# Altium PCB CTR-Controller-Rev-A.PcbDoc (part 1 of 2)
Units mil, origin at the board's own origin, x right, y up, seen from the top; angles counter-clockwise.
Board outline 3956.69 x 4568.8 mil, 2 copper layers (Top Layer, Bottom Layer), stack 61.2 mil thick; 177 components, 110 nets, 500 pads, 208 vias.
Unrouted connection lines stored in the file: 115.
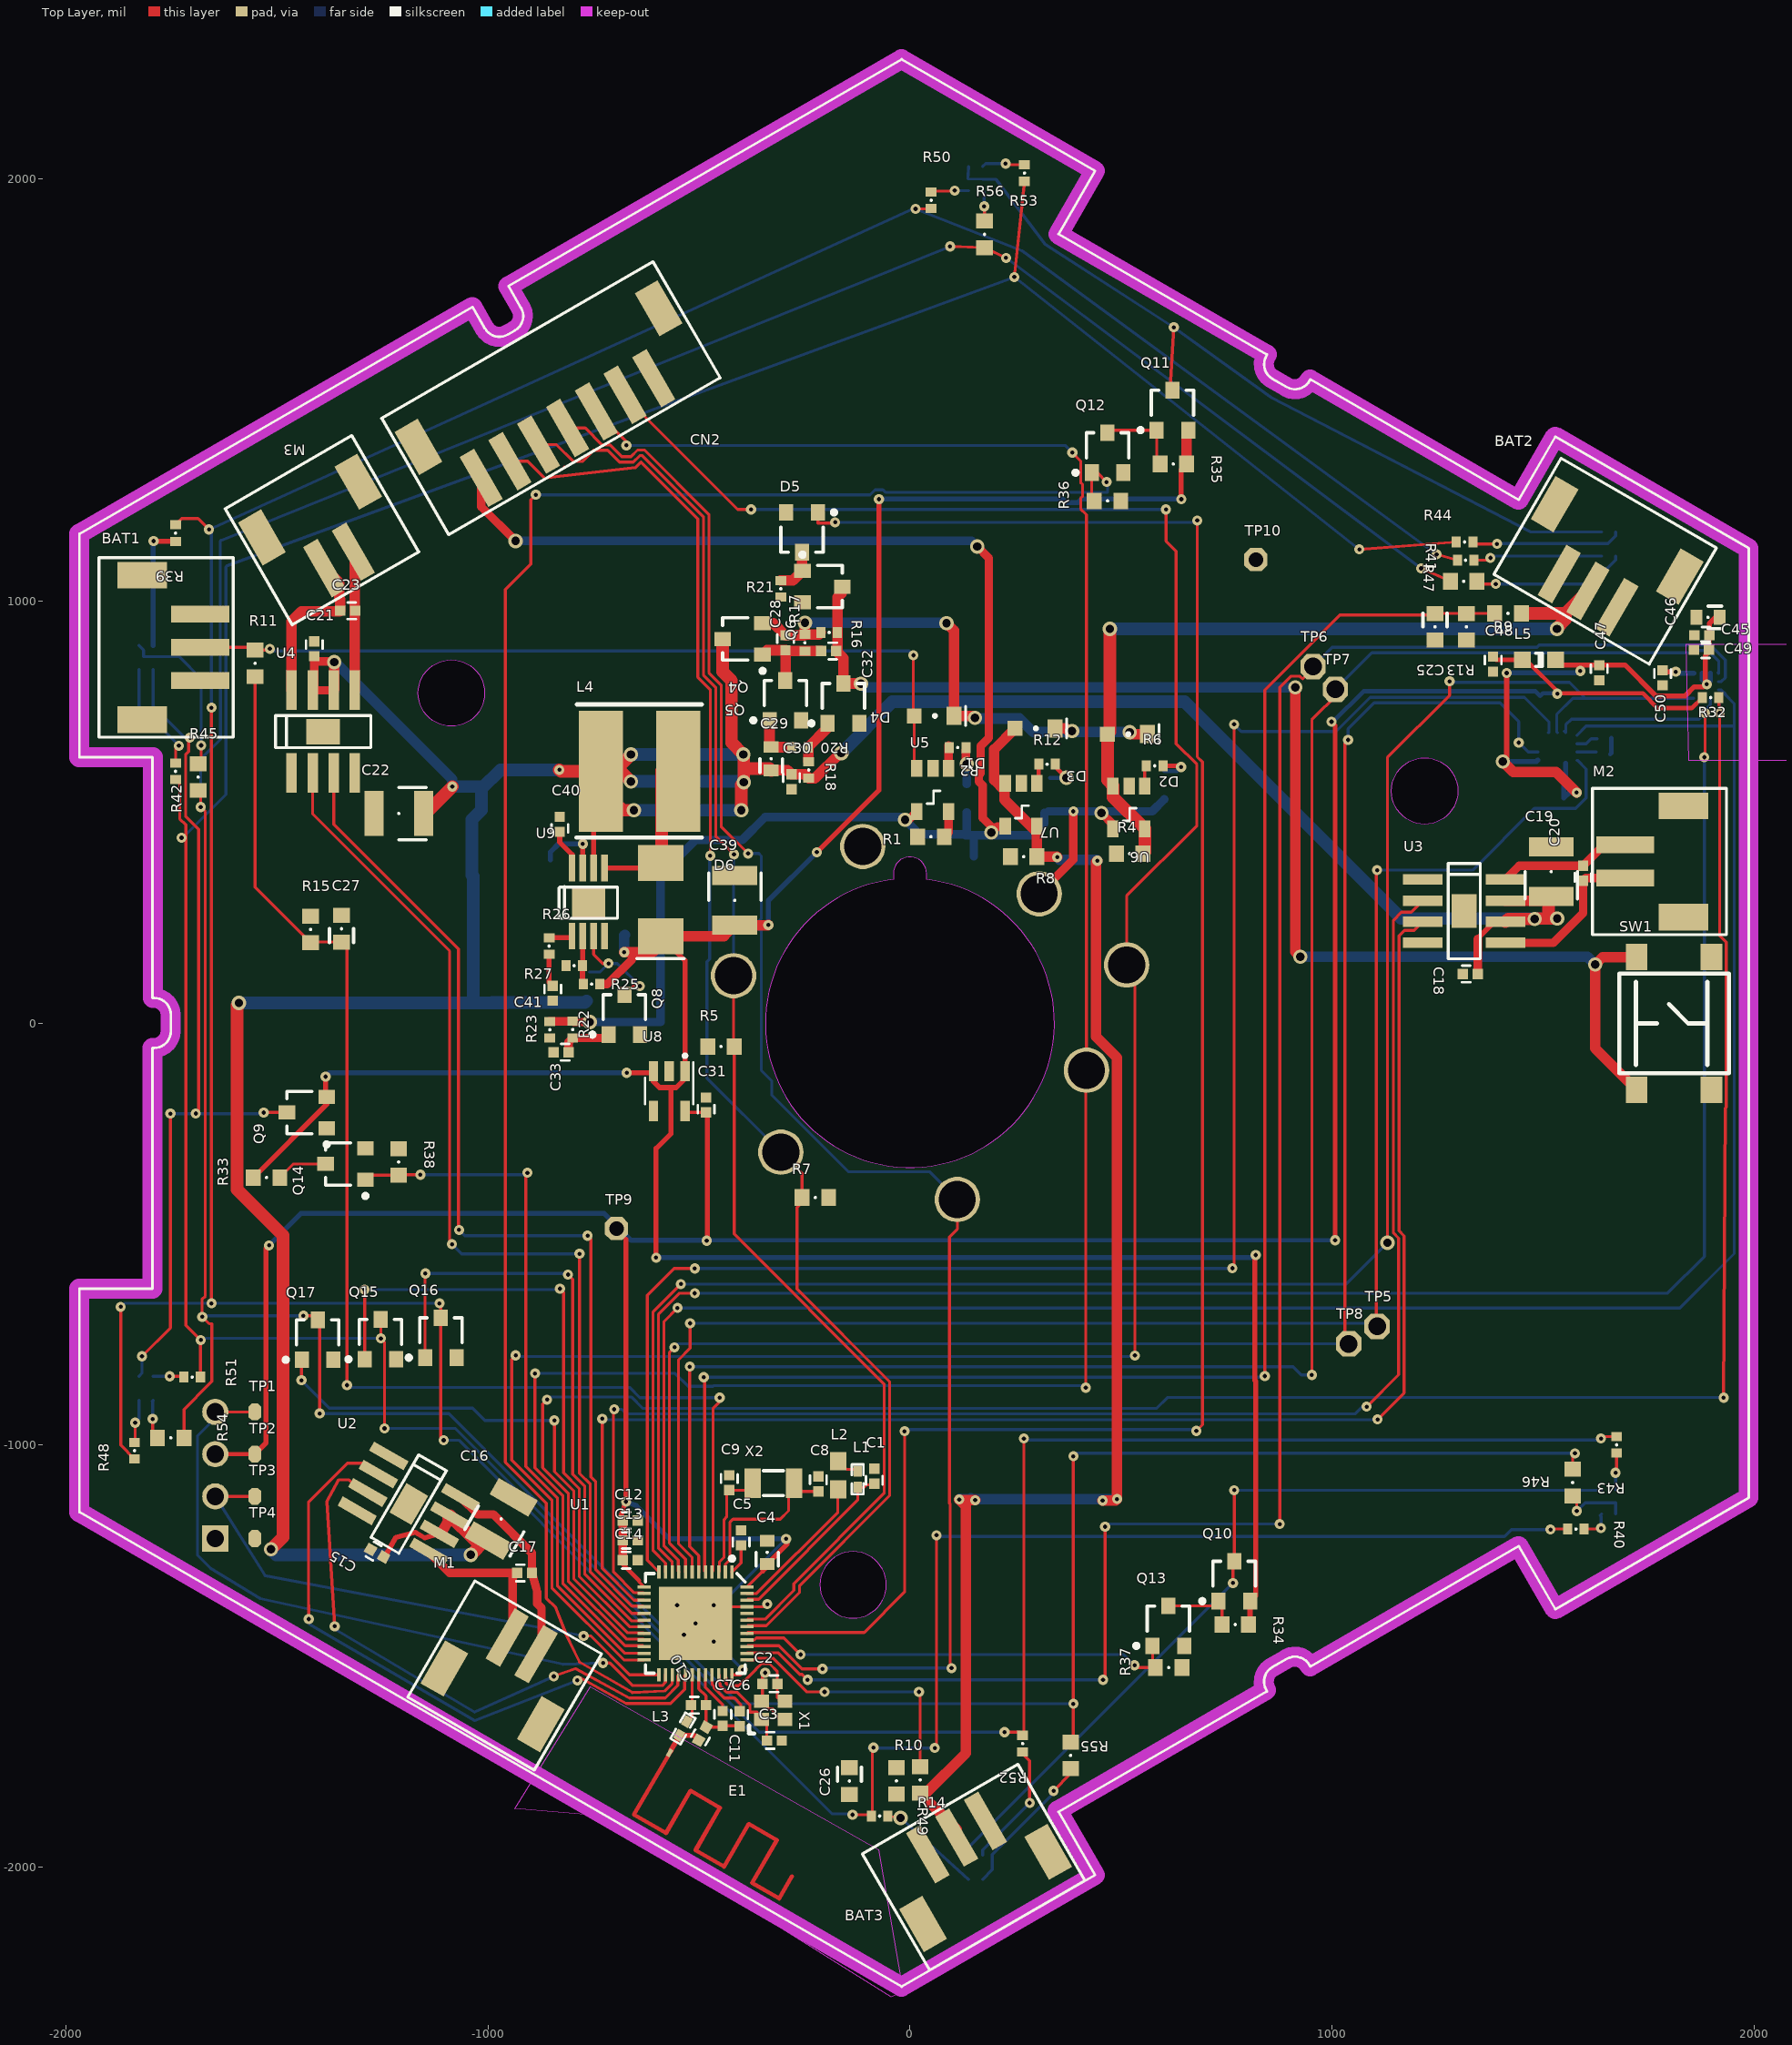
[diagram p0: Top Layer view]
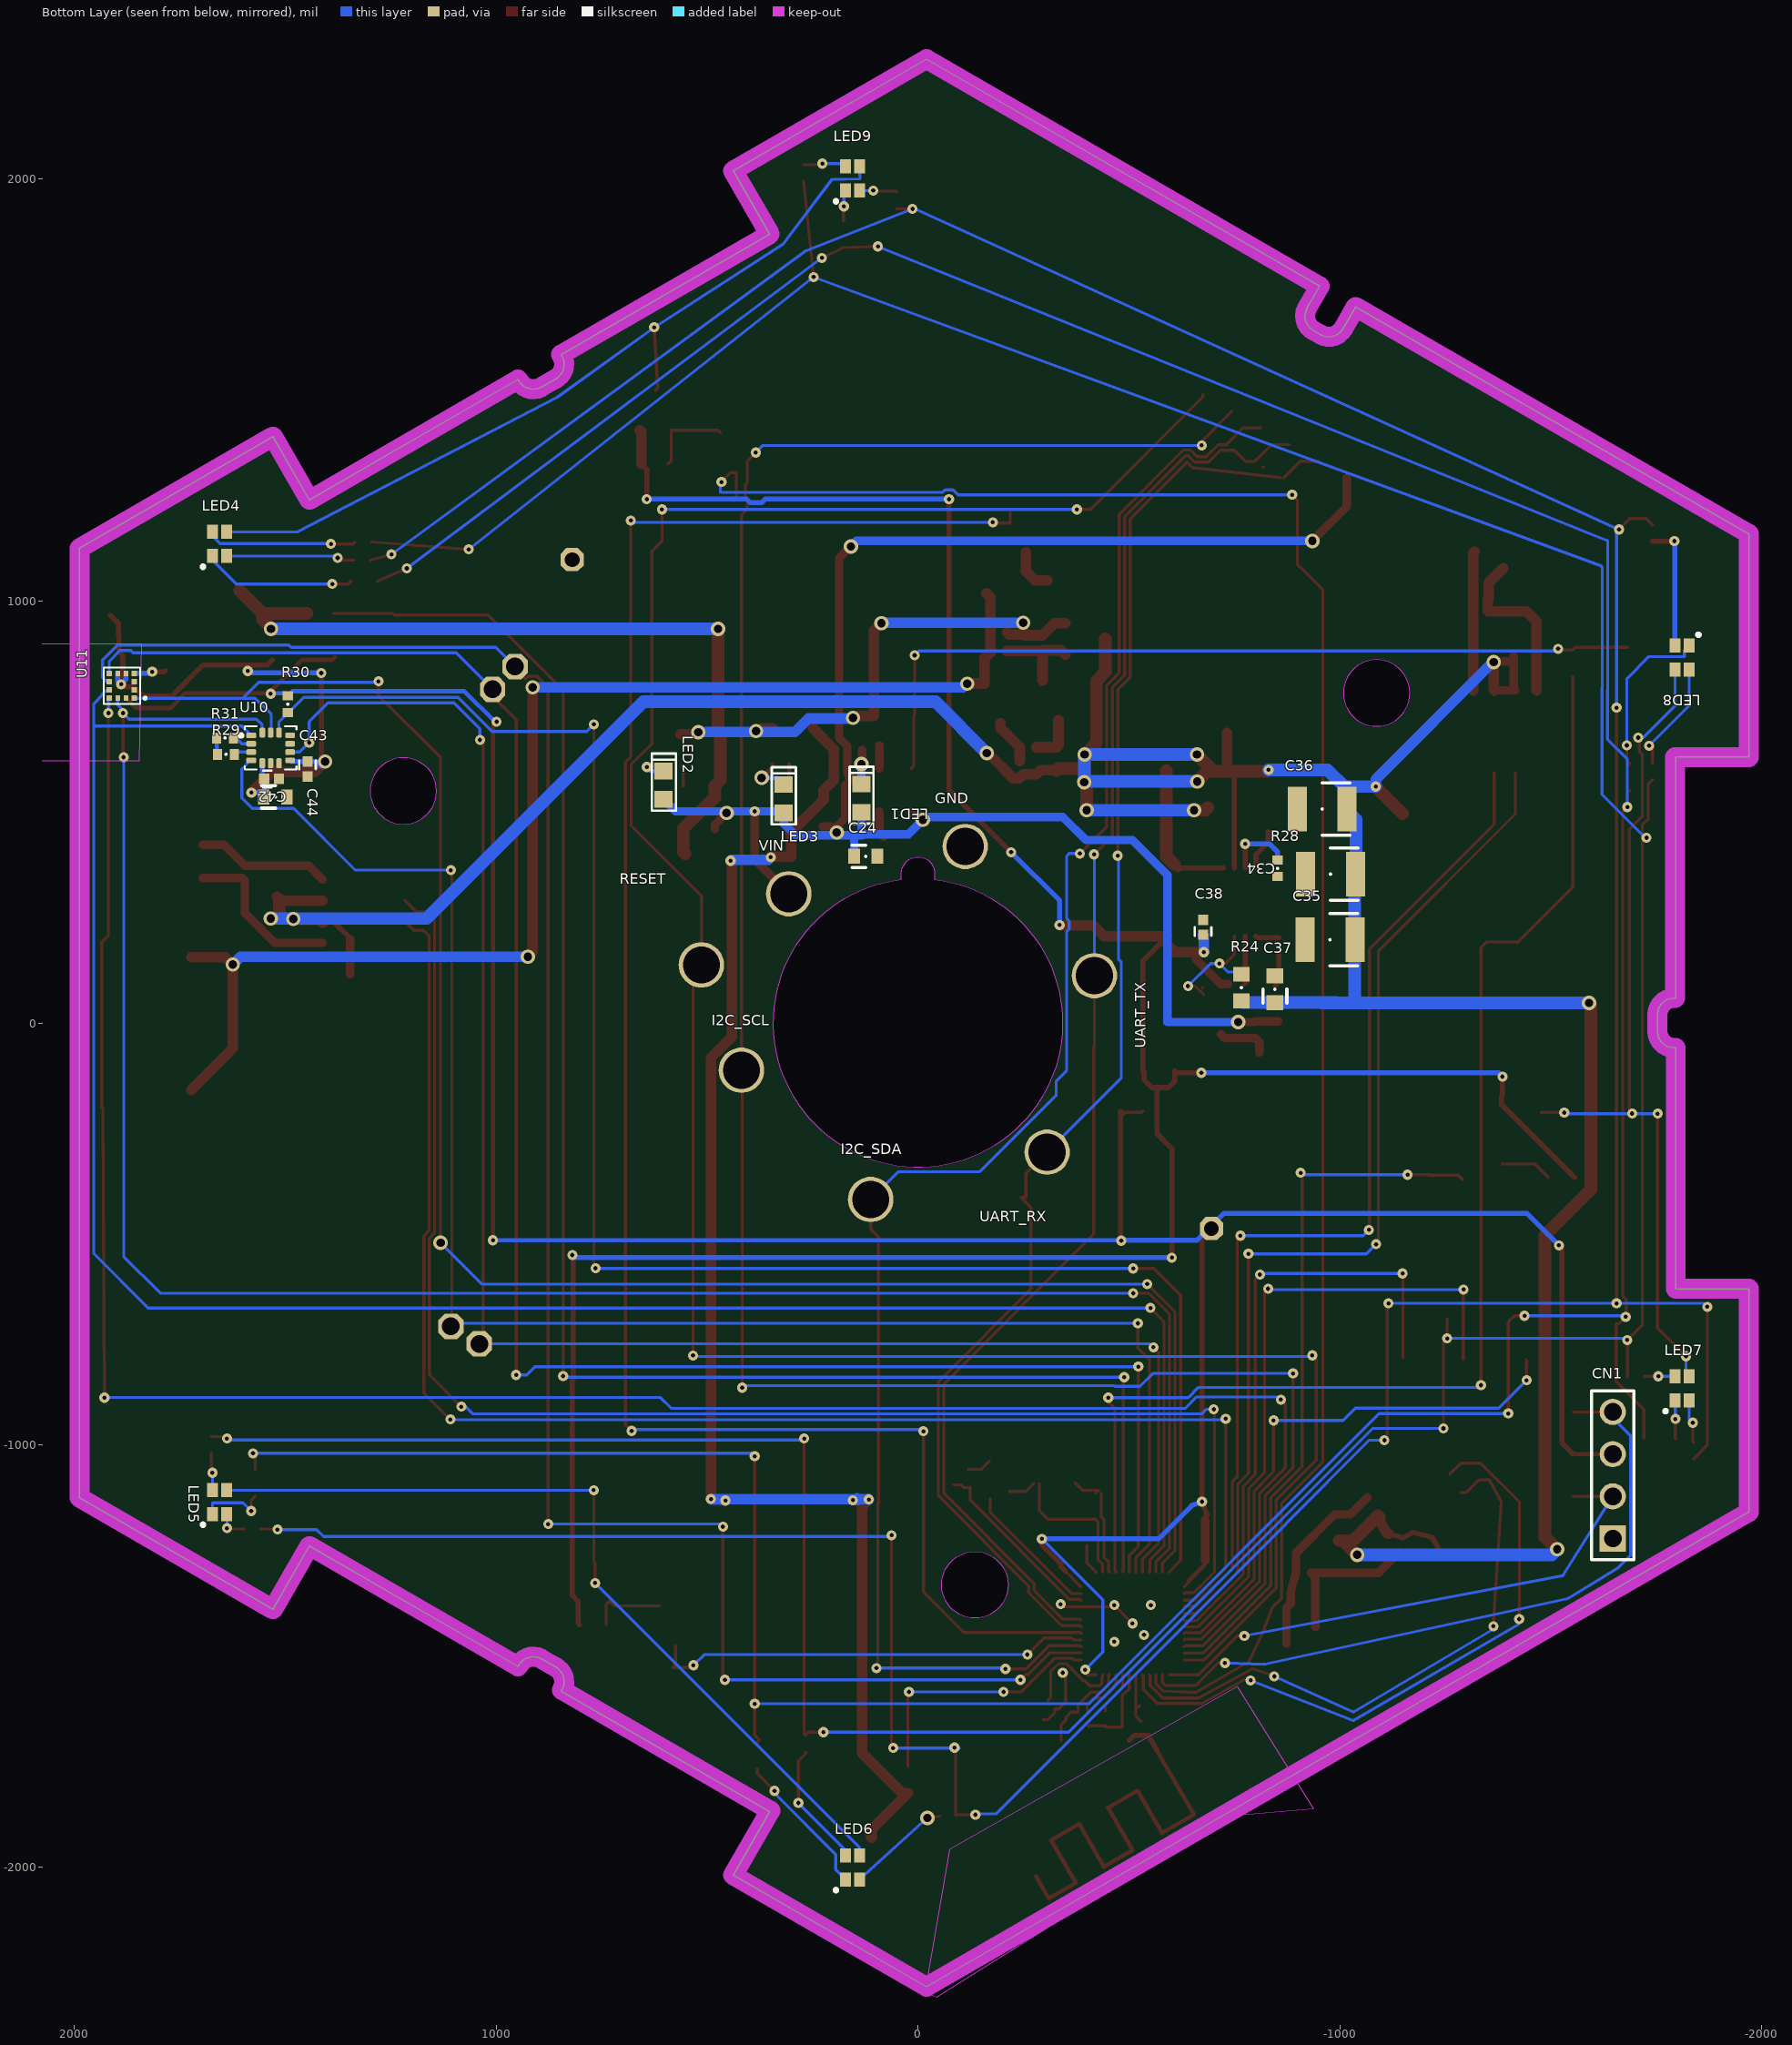
[diagram p1: Bottom Layer view, seen from below]
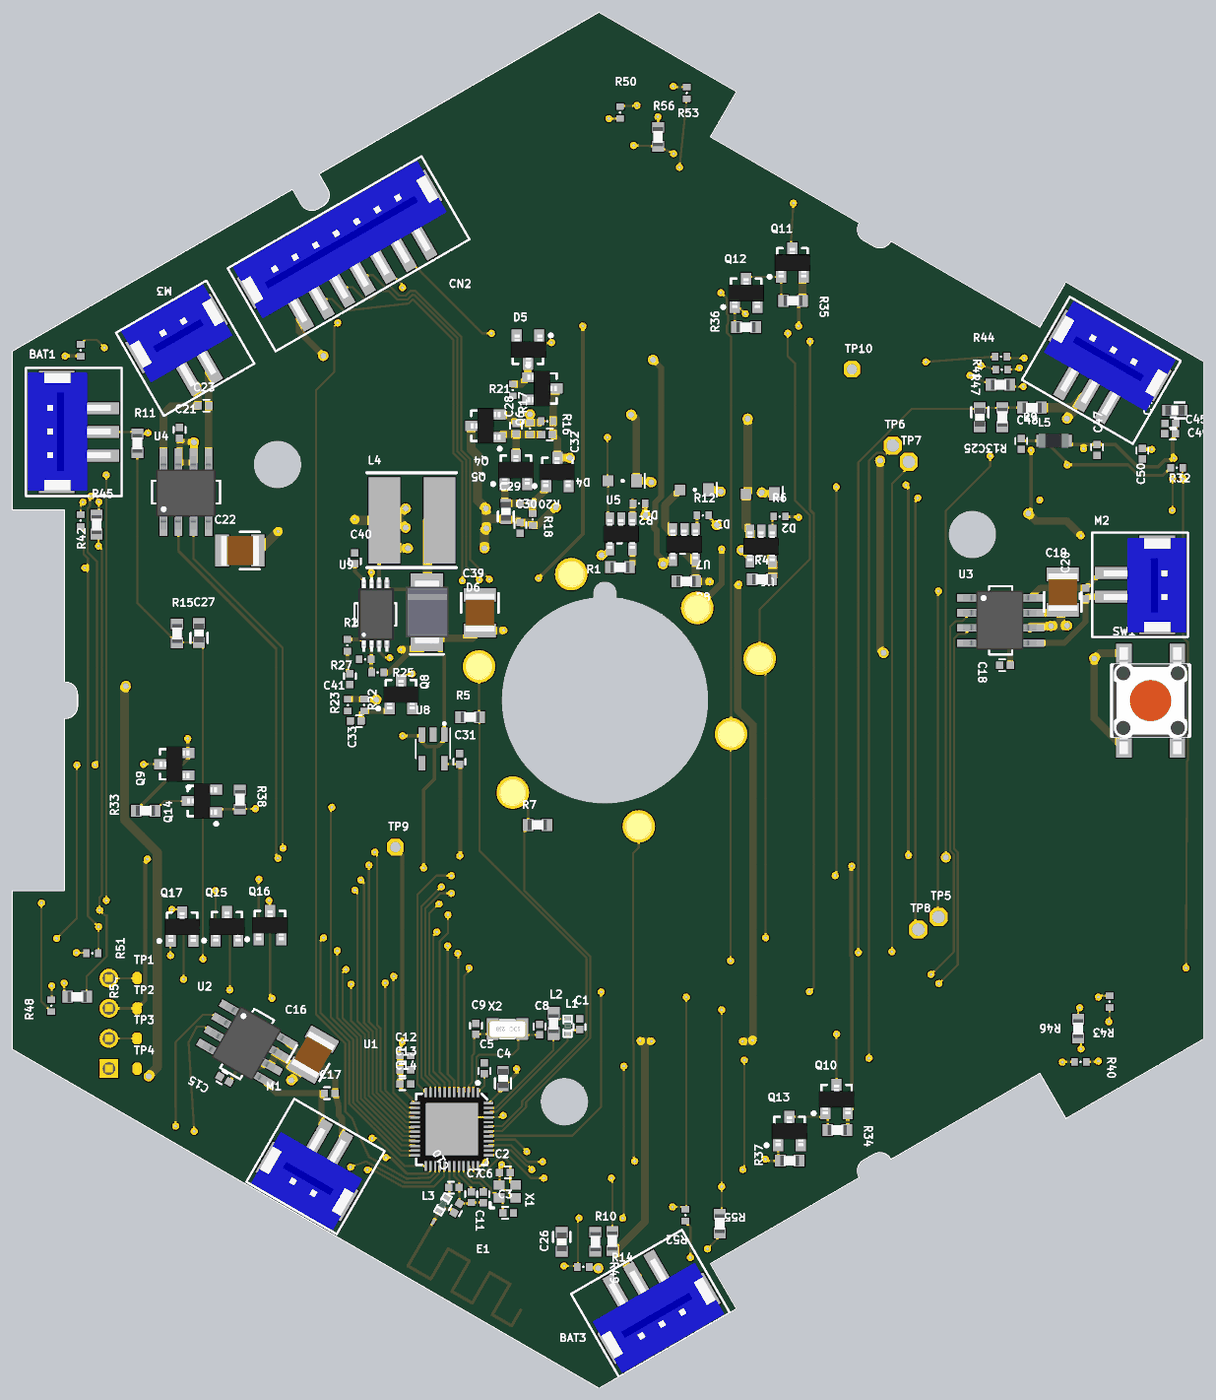
[diagram p3: 3D render of the assembled board from above, using the file's embedded part models]

## Layer stack, top to bottom
Top Solder: solder mask 0.4, Solder Resist, Dk 3.5
Top Layer: signal copper 1.8
Dielectric1: core 57.6, Dk 4.2
Bottom Layer: signal copper 1.8
Bottom Solder: solder mask 0.4, Solder Resist, Dk 3.5

## Board outline
-1969.29,-629.92 -1796.06,-629.92 -1796.06,-59.06 -1792.13,-59.06 -1783.37,-58.07 -1775.04,-55.16 -1767.58,-50.47 -1761.35,-44.23 -1756.65,-36.77 -1753.74,-28.45 -1752.76,-19.68 -1752.76,19.68 -1753.74,28.45 -1756.65,36.77 -1761.35,44.23 -1767.58,50.47 -1775.04,55.16 -1783.37,58.07 -1792.13,59.06 -1796.06,59.06 -1796.06,629.92 -1969.29,629.92 -1969.29,1159.25 -1037.5,1697.22 -1007.97,1646.07 -1002.74,1638.98 -996.06,1633.23 -988.26,1629.11 -979.75,1626.83 -970.94,1626.5 -962.27,1628.14 -954.19,1631.66 -937.15,1641.5 -930.49,1646.34 -924.98,1652.46 -920.86,1659.59 -918.32,1667.41 -917.46,1675.6 -918.8,1685.79 -922.74,1695.29 -952.26,1746.43 -20.47,2284.4 437.94,2019.74 351.32,1869.71 845.71,1584.28 843.74,1580.87 840.21,1572.79 838.57,1564.13 838.9,1555.32 841.19,1546.8 845.31,1539.01 851.06,1532.33 858.15,1527.09 892.24,1507.41 900.33,1503.88 908.99,1502.24 917.8,1502.57 926.31,1504.85 934.11,1508.97 940.79,1514.72 946.03,1521.82 947.99,1525.23 1442.38,1239.79 1528.99,1389.81 1987.4,1125.15 1987.4,-1125.15 1528.99,-1389.81 1442.38,-1239.79 947.99,-1525.23 946.03,-1521.82 940.79,-1514.72 934.11,-1508.97 926.31,-1504.85 917.8,-1502.57 908.99,-1502.24 900.33,-1503.88 892.24,-1507.41 858.15,-1527.09 851.06,-1532.33 845.31,-1539.01 841.19,-1546.8 838.9,-1555.32 838.57,-1564.13 840.21,-1572.79 843.74,-1580.87 845.71,-1584.28 351.32,-1869.71 437.94,-2019.74 -20.47,-2284.4 -1969.29,-1159.25
cut-out: 1219.68,471.03 cw(c1219.68,549.77) 1140.95,549.77 cw(c1219.68,549.77) 1219.68,628.51 cw(c1219.68,549.77) 1298.42,549.77 cw(c1219.68,549.77)
cut-out: -1087.14,703.33 cw(c-1087.14,782.07) -1165.88,782.07 cw(c-1087.14,782.07) -1087.14,860.81 cw(c-1087.14,782.07) -1008.4,782.07 cw(c-1087.14,782.07)
cut-out: -213.65,-1331.85 ccw(c-134.91,-1331.85) -134.91,-1410.59 ccw(c-134.91,-1331.85) -56.17,-1331.85 ccw(c-134.91,-1331.85) -134.91,-1253.11 ccw(c-134.91,-1331.85)
cut-out: -39.51,340.25 ccw(c-0.14,0) 39.23,340.25 39.23,354.33 ccw(c-0.14,354.33) -39.51,354.33

## Design rules (kind name [scope] priority, off if disabled: settings)
Clearance [All] p1: gap=6
ComponentClearance ComponentClearance_BAT [InComponent('BT1') vs InComponent('CN3')] p1: gap=0 collisioncheckmode=3 verticalgap=0 showdistances=FALSE
ComponentClearance [InComponent('E1')] p2: gap=0 collisioncheckmode=3 verticalgap=0 showdistances=FALSE
HoleSize [All] p1: absolutevalues=TRUE maxlimit=300 minlimit=10 maxpercent=80.000 minpercent=20.000
HoleToHoleClearance [All] p1: gap=7 allowstackedmicrovias=TRUE
MinimumSolderMaskSliver [InNet('VIN')] p1: minsoldermaskwidth=0.5
NetAntennae NetAntennae_ANT [InNetClass('ANT')] p1: netantennaetolerance=0
NetAntennae [All] p2: netantennaetolerance=0
PolygonConnect [All] p1: connectstyle=Relief reliefconductorwidth=10 reliefentries=4 polygonreliefangle="90 Angle" airgapwidth=10
RoutingVias [All] p1: holewidth=16 width=26 viastyle="Through Hole" minholewidth=10 minwidth=22 maxholewidth=35 maxwidth=50
SMDNeckDown [All] p1: percent=120.000
SilkToBoardRegionClearance [InNet('3.3V')] p1:
SilkToSilkClearance [All] p1: silktosilkclearance=0
SilkToSolderMaskClearance [IsPad] p1: minsilkscreentomaskgap=0 clearancetoexposedcopper=TRUE
SolderMaskExpansion [All] p1: expansion=4
Width Width_BT [InNetClass('BT')] p1: maxlimit=40 minlimit=10 preferedwidth=15
Width Width_VDD [InNet('3.3V')] p2: maxlimit=20 minlimit=7 preferedwidth=10
Width [All] p3: maxlimit=30 minlimit=6 preferedwidth=7
22 further rules are at their usual default settings.

## Classes and differential pairs
net class BT: NetC17_1 NetC17_2 NetC20_1 NetC20_2 NetC23_1 NetC23_2 VBAT3 VIN_5V
component class 5V: C16 C19 C22 C34 C35 C36 C37 C38 C39 C40 C41 D6 L4 Q8 Q12 Q13 Q14 Q15 Q16 Q17 R24 R25 R26 R27 R28 U9
component class CPU: C1 C2 C3 C4 C5 C6 C7 C8 C9 C10 C11 C12 C13 C14 E1 L1 L2 L3 X1
component class IMU: C42 C43 C45 C47 C48 C49 C50 L5 R29 R30 R31 R32 TP5 TP6 TP7 TP8 TP9 TP10
component class motor1: C15 C17 U2
component class motor2: C18 C20 U3
component class motor3: C21 C23 U4
component class power: C24 C28 C29 C30 C31 C32 C33 D4 D5 LED1 LED2 LED3 Q4 Q5 Q6 Q9 Q10 Q11 R2 R6 R12 R16 R17 R18 R20 R21 R22 R23 SW1 U5 U6 U7 U8
component class PROG: CN1 TP1 TP2 TP3 TP4
component class CTR-Controller-Rev-A-LED-5: LED4 LED5 LED6 LED7 LED8 LED9 Q9 Q10 Q11 Q12 Q13 Q14 Q15 Q16 Q17 R33 R34 R35 R36 R37 R38 R39 R40 R41 R42 R43 R44 R45 R46 R47 R48 R49 R50 R51 R52 R53 R54 R55 R56

## Components (designator, comment, footprint, x,y, rotation, side; value= is the part's Value field where it differs from the comment)
BAT1 "B3B-PH-SM4-TB" JST-B3B-PH-SM4-TB -1682.28,811.42 r90 top
BAT2 "B3B-PH-SM4-TB" JST-B3B-PH-SM4-TB 1538.82,1063.78 r330 top
BAT3 "B3B-PH-SM4-TB" JST-B3B-PH-SM4-TB 178.54,-1891.49 r210 top
C1 "1uF" CAPC0402(1005)_N -84.65,-1074.41 r90 top
C2 "12pF" CAPC0402(1005)_N -332.28,-1566.54 r180 top
C3 "12pF" CAPC0402(1005)_N -321.65,-1700.79 r0 top
C4 "4.7UF 0603" CAPC0603(1608)_L -338.58,-1254.72 r90 top
C5 "0.1uF" CAPC0402(1005)_N -400.39,-1220.47 r90 top
C6 "100pF" CAPC0402(1005)_N -403.94,-1649.21 r270 top
C7 "100pF" CAPC0402(1005)_N -444.09,-1648.43 r270 top
C8 "15pF" CAPC0402(1005)_N -217.32,-1092.52 r270 top
C9 "15pF" CAPC0402(1005)_N -428.35,-1089.76 r270 top
C10 "0.8pF" CAPC0402(1005)_N -501.57,-1616.93 r0 top
C11 "1.2pF" CAPC0402(1005)_N -492.13,-1684.65 r60 top
C12 "0.1uF" CAPC0402(1005)_N -662.99,-1179.13 r0 top
C13 "0.1uF" CAPC0402(1005)_N -662.99,-1226.38 r0 top
C14 "0.1uF" CAPC0402(1005)_N -662.99,-1273.62 r0 top
C15 "0.1uF" CAPC0402(1005)_N -1263.07,-1257 r330 top
C16 "100uF" CAPC1210(3225)_N -969.27,-1175.69 r60 top
C17 "0.1uF" CAPC0402(1005)_N -913.78,-1303.54 r0 top
C18 "0.1uF" CAPC0402(1005)_N 1327.95,116.14 r0 top
C19 "100uF" CAPC1210(3225)_N 1519.68,358.66 r90 top
C20 "0.1uF" CAPC0402(1005)_N 1595.28,354.72 r90 top
C21 "0.1uF" CAPC0402(1005)_N -1412.2,887.01 r270 top
C22 "100uF" CAPC1210(3225)_N -1211.81,496.46 r180 top
C23 "0.1uF" CAPC0402(1005)_N -1333.07,977.17 r180 top
C24 "4.7UF 0603" CAPC0603(1608)_L 123.62,394.88 r180 bottom
C25 "CAP 10UF 10V 10% X5R 0603" CAPC0603(1608)_N 1244.29,938.98 r270 top
C26 "CAP 10UF 10V 10% X5R 0603" CAPC0603(1608)_N -143.7,-1796.85 r270 top
C27 "CAP 10UF 10V 10% X5R 0603" CAPC0603(1608)_N -1347.64,223.23 r90 top
C28 "0.1uF" CAPC0402(1005)_N -295.28,901.18 r270 top
C29 "4.7UF 0603" CAPC0603(1608)_L -329.13,626.38 r90 top
C30 "0.1uF" CAPC0402(1005)_N -281.1,571.65 r270 top
C31 "1uF" CAPC0402(1005)_N -483.46,-194.49 r90 top
C32 "1uF" CAPC0402(1005)_N -192.91,881.5 r180 top
C33 "1uF" CAPC0402(1005)_N -827.17,-69.29 r180 top
C34 "100uF" CAPC1210(3225)_N -977.95,352.76 r0 bottom
C35 "100uF" CAPC1210(3225)_N -976.77,197.24 r0 bottom
C36 "100uF" CAPC1210(3225)_N -958.27,507.09 r0 bottom
C37 "CAP 10UF 10V 10% X5R 0603" CAPC0603(1608)_N -846.06,79.92 r90 bottom
C38 "0.1uF" CAPC0402(1005)_N -675.98,226.77 r90 bottom
C39 "100uF" CAPC1210(3225)_N -415.35,290.55 r270 top
C40 "0.1uF" CAPC0402(1005)_N -830.32,470.87 r90 top
C41 "2200pF" CAPC0402(1005)_N -846.85,70.47 r270 top
C42 "0.1uF" CAPC0402(1005)_N 1532.28,578.35 r180 bottom
C43 "0.01uF" CAPC0402(1005)_N 1446.85,601.97 r270 bottom
C44 "4.7UF 0603" CAPC0603(1608)_L 1523.23,535.83 r180 bottom
C45 "0.1uF" CAPC0402(1005)_N 1876.77,918.9 r180 top
C46 "4.7UF 0603" CAPC0603(1608)_L 1891.34,961.42 r180 top
C47 "2.2uF" CAPC0402(1005)_N 1633.46,829.92 r270 top
C48 "2.2uF" CAPC0402(1005)_N 1381.89,850.39 r270 top
C49 "0.01uF" CAPC0402(1005)_N 1875.59,884.65 r180 top
C50 "0.1uF" CAPC0402(1005)_N 1783.86,818.11 r270 top
CN1 "Prototyping Programming" HDR1X4 -1646.85,-1222.05 r90 bottom
CN2 "JST-B7B-PH-SM4-TB" JST-B7B-PH-SM4-TB -1016.46,1292.13 r30 top
D1 "DB2J20800L" SMini2-F5-B 104.33,727.95 r180 top
D2 "DB2J20800L" SMini2-F5-B 562.6,684.65 r180 top
D3 "DB2J20800L" SMini2-F5-B 343.7,698.03 r180 top
D4 "BAT54" SOT23 -157.87,757.48 r0 top
D5 "BAT54" SOT23 -255.91,1162.99 r180 top
D6 "MBRS130LT3" DO-214AA -591.34,292.52 r270 top
E1 "50ohm 2.4GHz" ANT-Trace-nRF51822 -443.95,-1934.54 r60 top
GND "Pogo Pin" POGO_PIN -112.09,418.31 r90 bottom
I2C_SCL "Pogo Pin" POGO_PIN 418.31,-112.09 r90 bottom
I2C_SDA "Pogo Pin" POGO_PIN 112.09,-418.31 r90 bottom
L1 "15nH" IND-0402 -124.02,-1081.5 r270 top
L2 "10uH" IND-0603 -170.08,-1072.05 r90 top
L3 "3.9nH" IND-0402 -538.19,-1672.05 r240 top
L4 "10uH 3A" 7x7SMINDC -648.03,694.88 r90 top
L5 "47uH" "IND-2012 Chip" 1490.94,860.63 r180 top
LED1 "G" SM-LED-0603 134.25,499.21 r270 bottom
LED2 "G" SM-LED-0603 602.76,530.32 r270 bottom
LED3 "G" SM-LED-0603 318.5,498.03 r270 bottom
LED4 "Red, Green, Blue (RGB)" LTST-C19HE1WT 1655.61,1135.32 r90 bottom
LED5 "Red, Green, Blue (RGB)" LTST-C19HE1WT 1655.61,-1135.32 r90 bottom
LED6 "Red, Green, Blue (RGB)" LTST-C19HE1WT 155.41,-2001.46 r90 bottom
LED7 "Red, Green, Blue (RGB)" LTST-C19HE1WT -1811.02,-866.14 r90 bottom
LED8 "Red, Green, Blue (RGB)" LTST-C19HE1WT -1811.02,866.14 r270 bottom
LED9 "Red, Green, Blue (RGB)" LTST-C19HE1WT 155.41,2001.46 r90 bottom
M1 "JST-B2B-PH-SM4-TB" JST-B2B-PH-SM4-TB -886.42,-1496.22 r150 top
M2 "JST-B2B-PH-SM4-TB" JST-B2B-PH-SM4-TB 1695.28,422.05 r270 top
M3 "JST-B2B-PH-SM4-TB" JST-B2B-PH-SM4-TB -1387.48,1077.95 r30 top
Q4 "FDN360P" SOT23 -396.85,910.24 r90 top
Q5 "2N7002P" SOT23 -295.67,764.57 r0 top
Q6 "2N7002P" SOT23 -207.87,1034.25 r270 top
Q8 "2N7002P" SOT23 -677.17,19.68 r0 top
Q9 "FDN360P" SOT23 -1429.92,-212.2 r90 top
Q10 "FDN360P" SOT23 768.5,-1323.23 r0 top
Q11 "FDN360P" SOT23 622.05,1452.36 r0 top
Q12 "2N7002P" SOT23 468.11,1351.57 r0 top
Q13 "2N7002P" SOT23 612.2,-1429.13 r0 top
Q14 "2N7002P" SOT23 -1338.19,-334.25 r90 top
Q15 "2N7002P" SOT23 -1255.12,-750 r0 top
Q16 "2N7002P" SOT23 -1112.2,-746.06 r0 top
Q17 "2N7002P" SOT23 -1403.94,-751.18 r0 top
R1 "6.04k" RESC0603(1608)_N 49.61,441.34 r0 top
R2 "576" RESC0402(1005)_N 112.99,652.76 r0 top
R4 "6.04k" RESC0603(1608)_N 520.47,401.18 r0 top
R5 "100K" RESC0603(1608)_N -448.03,-55.91 r0 top
R6 "576" RESC0402(1005)_N 579.92,609.45 r0 top
R7 "100K" RESC0603(1608)_N -224.41,-413.78 r180 top
R8 "6.04k" RESC0603(1608)_N 269.29,394.09 r0 top
R9 "1M" RESC0603(1608)_N 1417.32,970.87 r0 top
R10 "1M" RESC0603(1608)_N 24.02,-1794.09 r270 top
R11 "1M" RESC0603(1608)_N -1552.36,852.36 r90 top
R12 "576" RESC0402(1005)_N 324.8,613.39 r0 top
R13 "1M" RESC0603(1608)_N 1318.6,938.98 r270 top
R14 "1M" RESC0603(1608)_N -32.28,-1796.46 r270 top
R15 "1M" RESC0603(1608)_N -1420.87,221.65 r90 top
R16 "10K" RESC0402(1005)_N -191.73,925.59 r180 top
R17 "100K 0402" RESC0402(1005)_N -249.21,901.18 r90 top
R18 "100K 0402" RESC0402(1005)_N -240.16,599.61 r270 top
R20 "300K" RESC0402(1005)_N -261.02,653.54 r180 top
R21 "10K" RESC0402(1005)_N -306.3,1029.13 r90 top
R22 "100 0402" RESC0402(1005)_N -799.61,-15.75 r90 top
R23 "10K" RESC0402(1005)_N -853.94,-16.14 r90 top
R24 "510" RESC0603(1608)_N -766.54,83.86 r270 bottom
R25 "64.9K" RESC0402(1005)_N -754.72,92.13 r0 top
R26 "20K 0402" RESC0402(1005)_N -855.51,182.28 r270 top
R27 "20K 0402" RESC0402(1005)_N -796.06,135.83 r0 top
R28 "20K 0402" RESC0402(1005)_N -852.36,366.54 r270 bottom
R29 "10K" RESC0402(1005)_N 1640.16,636.61 r0 bottom
R30 "10K" RESC0402(1005)_N 1493.7,755.51 r90 bottom
R31 "10K" RESC0402(1005)_N 1642.52,675.59 r180 bottom
R32 "10K" RESC0402(1005)_N 1897.64,771.26 r0 top
R33 "10K 1%" RESC0603(1608)_N -1525.2,-366.54 r180 top
R34 "10K 1%" RESC0603(1608)_N 770.87,-1425.98 r0 top
R35 "10K 1%" RESC0603(1608)_N 624.02,1324.8 r0 top
R36 "100K" RESC0603(1608)_N 468.11,1237.4 r180 top
R37 "100K" RESC0603(1608)_N 612.99,-1527.95 r180 top
R38 "100K" RESC0603(1608)_N -1212.2,-329.53 r270 top
R39 "?" RESC0402(1005)_N -1740.95,1161.02 r270 top
R40 "?" RESC0402(1005)_N 1578.35,-1199.61 r0 top
R41 "?" RESC0402(1005)_N 1316.93,1096.85 r0 top
R42 "?" RESC0402(1005)_N -1740.94,596.46 r90 top
R43 "?" RESC0402(1005)_N 1674.8,-1000 r270 top
R44 "?" RESC0402(1005)_N 1314.57,1140.16 r0 top
R45 "150" RESC0603(1608)_N -1687.4,582.68 r90 top
R46 "150" RESC0603(1608)_N 1570.47,-1089.37 r270 top
R47 "150" RESC0603(1608)_N 1312.2,1046.85 r0 top
R48 "?" RESC0402(1005)_N -1838.19,-1013.78 r90 top
R49 "?" RESC0402(1005)_N -72.05,-1879.92 r0 top
R50 "?" RESC0402(1005)_N 50,1950 r90 top
R51 "?" RESC0402(1005)_N -1701.57,-839.37 r180 top
R52 "?" RESC0402(1005)_N 266.93,-1708.27 r270 top
R53 "?" RESC0402(1005)_N 271.26,2014.57 r90 top
R54 "150" RESC0603(1608)_N -1752.36,-983.46 r180 top
R55 "150" RESC0603(1608)_N 380.71,-1736.22 r270 top
R56 "150" RESC0603(1608)_N 176.38,1869.29 r90 top
RESET "Pogo Pin" POGO_PIN 513.39,137.56 r90 bottom
SW1 "SW-PB SMD 5mm Red" "SW TACT Red 6mm x 6mm" 1811.02,-1.18 r270 top
TP1 "Test Point" TestPoint-SM -1553.15,-922.05 r180 top
TP2 "Test Point" TestPoint-SM -1553.15,-1022.05 r180 top
TP3 "Test Point" TestPoint-SM -1553.15,-1122.05 r180 top
TP4 "Test Point" TestPoint-SM -1553.15,-1222.05 r180 top
TP5 "Test Point" "TestPoint-TH 42 mil" 1107.09,-719.29 r90 top
TP6 "Test Point" "TestPoint-TH 42 mil" 955.12,844.88 r90 top
TP7 "Test Point" "TestPoint-TH 42 mil" 1008.27,790.94 r90 top
TP8 "Test Point" "TestPoint-TH 42 mil" 1039.76,-760.63 r90 top
TP9 "3V" "TestPoint-TH 35 mil" -695.67,-487.4 r90 top
TP10 "GND" "TestPoint-TH 35 mil" 819.68,1098.03 r90 top
U1 "nRF52832" QFN40P600X600X90-48N -508.66,-1423.23 r270 top
U2 "GPY0061A" SOG.050/8C-T -1235.36,-1026.38 r240 top
U3 "GPY0061A" SOG.050/8C-T 1215.39,339.96 r270 top
U4 "GPY0061A" SOG.050/8C-T -1465.94,592.55 r0 top
U5 "Li-Ion Battery Charger" SOT23-5 91.14,603.18 r180 top
U6 "Li-Ion Battery Charger" SOT23-5 556.1,561.84 r180 top
U7 "Li-Ion Battery Charger" SOT23-5 300.59,568.14 r180 top
U8 "3.3 V LDO Regulator" TCRFEF -570.87,-161.42 r180 top
U9 "SC4501" SC4501 -801.18,205.91 r0 top
U10 "LSM6DS3" LSM6DS3 1534.25,651.97 r270 bottom
U11 "LIS3MDL" LIS3MDL 1887.01,799.21 r90 bottom
UART_RX "Pogo Pin" POGO_PIN -306.23,-306.23 r90 bottom
UART_TX "Pogo Pin" POGO_PIN -418.31,112.09 r90 bottom
VIN "Pogo Pin" POGO_PIN 306.23,306.23 r90 bottom
X1 "32Mhz" SMXOSC/2X1.6 -351.57,-1651.18 r0 top
X2 "32.768kHz" FC-135 -324.02,-1090.94 r180 top

## Footprints (in the part's own frame and the unit in brackets; to place one, negate y for a bottom-side part, rotate by r counter-clockwise, add the part's x,y. Pads: shape width x height; smd on the part's side, far side on the other; paste and mask are expansions set on the pad)
7x7SMINDC [mm] "7x7mm Power Inductor"
  rect 7.3x2.65 smd: 1(-2.5,2.15) 2(-2.5,-2.5)
  silkscreen extent -6.48,-3.94 1.52,3.62
ANT-Trace-nRF51822 [mil]
  rect 20x10 smd: 1(114,211)
  Top Layer lines w10: 120,211 114,211 -55,211 -55,123.69 60.89,123.69 60.89,42.69 -55,42.69 -55,-35.32 61.89,-35.32 61.89,-112.31 -55,-112.32 -55,-186.32 5.08,-186.31
CAPC0402(1005)_N [mm] "Chip Capacitor, Body 1.0x0.5mm, Height 0.7mm, IPC Medium Density"
  rect 0.62x0.62 smd: 1(-0.45,0) 2(0.45,0)
  silkscreen extent -0.5,-0.5 0,0.5, body extent -0.55,-0.3 0.55,0.3, height 0.7
CAPC0603(1608)_L [mm] "Chip Capacitor, Body 1.6x0.8mm, Height 1.0mm, IPC High Density"
  rect 0.7x0.9 smd: 1(-0.7,0) 2(0.7,0)
  silkscreen extent -0.82,-0.68 0.05,0.68, body extent -0.8,-0.44 0.8,0.43, height 0.86
CAPC0603(1608)_N [mm] "Chip Capacitor, Body 1.6x0.8mm, Height 1.0mm, IPC Medium Density"
  rect 0.9x1 smd: 1(-0.8,0) 2(0.8,0)
  silkscreen extent -0.82,-0.73 0.05,0.73, body extent -0.8,-0.44 0.8,0.43, height 0.86
CAPC1210(3225)_N [mm] "Chip Capacitor, Body 3.2x2.5mm, Height 6.3mm, IPC Medium Density"
  rect 1.15x2.7 smd: 1(-1.5,0) 2(1.5,0)
  silkscreen extent -1.65,-1.58 0.05,1.57, body extent -1.6,-1.25 1.6,1.25, height 2.5
DO-214AA [mil] "Chip Diode; Body 4.3mm x 4mm"
  rect 85x107.99 smd: 1(-86.61,0) 2(86.61,0)
  silkscreen extent 140,-56 140,56, body extent -107,-70 106,72, height 91
FC-135 [mm]
  rect 1x1.8 smd: 1(-1.25,0) 2(1.25,0)
  silkscreen extent -0.6,-0.75 0.6,0.75, body extent -1.6,-0.75 1.6,0.75, height 0.81
HDR1X4 [mil] "Connector; Header; 4 Position"
  rect 62x62 hole 42: 1(0,0)
  round 62 hole 42: 2(100,0) 3(200,0) 4(300,0)
  silkscreen extent -50,-50 350,50, body extent -49,-51 351,49, height 330
IND-0402 [mm]
  rect 0.65x0.5 smd: 1(-0.475,0) 2(0.475,0)
  silkscreen extent -0.9,-0.35 0.9,0.35, body extent -0.5,-0.3 0.5,0.3, height 0.5
IND-0603 [mm] "Chip Inductor; Body 1.6 x 0.8 mm (LxW typ)"
  rect 1.1x1 smd: 1(-0.85,0) 2(0.85,0)
  body extent -0.83,-0.43 0.77,0.43, height 0.51
"IND-2012 Chip" [mm] "Chip Inductor; Body 2.0 x 1.2 mm (LxW typ)"
  rect 1x1 smd: 1(-1,0) 2(1,0)
  silkscreen extent -0.2,-0.4 0.2,0.4, body extent -1.24,-0.61 1.36,0.59, height 1.2
JST-B2B-PH-SM4-TB [mm] "2 Position x 2mm Top Entry Locking Header"
  rect 1.6x3 smd: 0(-2.35,3.5) 0(4.35,3.5)
  rect 1x3.5 smd: 1(0,0) 2(2,0)
  silkscreen extent -3.4,-1.98 5.4,6.1, body extent -2.95,-1 5,6, height 6.6
JST-B3B-PH-SM4-TB [mm] "3 Position x 2mm Top Entry Locking Header"
  rect 1.6x3 smd: 0(-2.35,3.5) 0(6.35,3.5)
  rect 1x3.5 smd: 1(0,0) 2(2,0) 3(4,0)
  silkscreen extent -3.4,-1.98 7.4,6.1, body extent -2.95,-1.05 7,5.95, height 6.6
JST-B7B-PH-SM4-TB [mm] "7 Position x 2mm Top Entry Locking Header"
  rect 1.6x3 smd: 0(-2.35,3.5) 0(14.35,3.5)
  rect 1x3.5 smd: 1(0,0) 2(2,0) 3(4,0) 4(6,0) 5(8,0) 6(10,0) 7(12,0)
  silkscreen extent -3.4,-1.98 15.47,6.1, body extent -2.98,-1.03 14.97,5.97, height 6.6
LIS3MDL [mm] "Pullback Quad Flat No-Lead (PQFN); 12 pin, 2.00 mm L X 2.00 mm W X 1.00 mm H body"
  rect 0.325x0.325 smd: 1(-0.75,-0.75) 2(-0.25,-0.75) 3(0.25,-0.75) 4(0.75,-0.75) 7(0.75,0.75) 8(0.25,0.75) 9(-0.25,0.75) 10(-0.75,0.75)
  rect 0.325x0.275 smd: 5(0.75,-0.25) 6(0.75,0.25) 11(-0.75,0.25) 12(-0.75,-0.25)
  silkscreen extent -1.09,-1.47 1.09,1.09, body extent -1,-1.15 1,0.85, height 1
LSM6DS3 [mm] "PQFN50P250X300X86-14NN - Pullback Quad Flat No-Lead (PQFN), 0.50 mm pitch; rect., pin 1 on short dimension, 4 pin X 3 pin, 2.50 mm L X 3.00 mm W X 0.86 mm H body"
  rrect51% 0.345x0.59 smd: 1(-0.75,-1.17) 2(-0.25,-1.17) 3(0.25,-1.17) 4(0.75,-1.17) 8(0.75,1.17) 9(0.25,1.17) 10(-0.25,1.17) 11(-0.75,1.17)
  rrect51% 0.59x0.345 smd: 5(0.92,-0.5) 6(0.92,0) 7(0.92,0.5) 12(-0.92,0.5) 13(-0.92,0) 14(-0.92,-0.5)
  silkscreen extent -1.3,-1.89 1.3,1.55, body extent -1.25,-1.5 1.25,1.5, height 0.86
LTST-C19HE1WT [mm] "low-cost low-height RGB LED"
  rect 0.85x0.65 smd: 1(-0.725,0.425) 2(0.725,0.425) 3(-0.725,-0.425) 4(0.725,-0.425)
  silkscreen extent -1.47,0.89 -1.27,1.09, body extent -1.11,-0.85 1.11,0.85, height 0.55
POGO_PIN [mil] "Through-hole pogo pin"
  round 107.76 hole 87.74: 1(0,0)
  body extent -76,-76 77,77, height 220
QFN40P600X600X90-48N [mm] "48-Pin QFN Nordic"
  rect 0.8x0.2 smd: 1(-3.1,2.2) 2(-3.1,1.8) 3(-3.1,1.4) 4(-3.1,1) 5(-3.1,0.6) 6(-3.1,0.2) 7(-3.1,-0.2) 8(-3.1,-0.6) 9(-3.1,-1) 10(-3.1,-1.4) 11(-3.1,-1.8) 12(-3.1,-2.2) 25(3.1,-2.2) 26(3.1,-1.8) 27(3.1,-1.4) 28(3.1,-1) 29(3.1,-0.6) 30(3.1,-0.2) 31(3.1,0.2) 32(3.1,0.6) 33(3.1,1) 34(3.1,1.4) 35(3.1,1.8) 36(3.1,2.2)
  rect 0.2x0.8 smd: 13(-2.2,-3.1) 14(-1.8,-3.1) 15(-1.4,-3.1) 16(-1,-3.1) 17(-0.6,-3.1) 18(-0.2,-3.1) 19(0.2,-3.1) 20(0.6,-3.1) 21(1,-3.1) 22(1.4,-3.1) 23(1.8,-3.1) 24(2.2,-3.1) 37(2.2,3.1) 38(1.8,3.1) 39(1.4,3.1) 40(1,3.1) 41(0.6,3.1) 42(0.2,3.1) 43(-0.2,3.1) 44(-0.6,3.1) 45(-1,3.1) 46(-1.4,3.1) 47(-1.8,3.1) 48(-2.2,3.1)
  rect 4.4x4.4 smd: 49(0,0)
  silkscreen extent -4.02,-3 3,3, body extent -3,-3 3,3, height 0.9
RESC0402(1005)_N [mm] "Chip Resistor, Body 1.0x0.5mm, IPC Medium Density"
  rect 0.55x0.65 smd: 1(-0.5,0) 2(0.5,0)
  silkscreen extent -0.05,-0.05 0.05,0.05, body extent -0.52,-0.27 0.53,0.28, height 0.4
RESC0603(1608)_N [mm] "Chip Resistor, Body 1.6x0.8mm, IPC Medium Density"
  rect 0.9x1 smd: 1(-0.8,0) 2(0.8,0)
  silkscreen extent -0.05,-0.05 0.05,0.05, body extent -0.8,-0.43 0.8,0.43, height 0.51
SC4501 [mm] "SC4501 0.65mm x 8 gull"
  rect 0.4x1.6 smd: 1(0,0) 2(0.65,0) 3(1.3,0) 4(1.95,0) 5(1.95,4.1) 6(1.3,4.1) 7(0.65,4.1) 8(0,4.1)
  rect 2x2 smd: 4(1,2)
  silkscreen extent -0.79,1.07 2.74,2.97, body extent -0.43,-1.13 2.57,5.15, height 1.09
SM-LED-0603 [mm] "0603 LED"
  rect 1x1.1 smd: 1(0,0) 2(-1.7,0)
  silkscreen extent -2.75,-0.71 0.69,0.74, body extent -1.65,-0.34 0,0.39, height 0.67
SMini2-F5-B [mm] "Panasonic Diode"
  rect 0.9x1.1 smd: 1(0,0)
  rect 0.9x0.9 smd: 2(2.4,0)
  silkscreen extent -0.7,-0.58 1.24,0.58
SMXOSC/2X1.6 [mm] "SM 2.0x1.6mm Crystal"
  rect 0.9x0.8 smd: 1(0,0) 2(1.4,0) 3(1.4,1.1) 4(0,1.1)
  silkscreen extent -0.76,-0.84 -0.46,-0.36, body extent -0.35,-0.28 1.73,1.35, height 0.5
SOG.050/8C-T [mil]
  rect 25x94 smd: 1(0,0) 2(50,0) 3(100,0) 4(150,0) 5(150,196) 6(100,196) 7(50,196) 8(0,196)
  rect 80x60 smd: 9(75,98)
  silkscreen extent -38,60 188,136, body extent -24,-27 173,217, height 73
SOT23 [mm] "SOT-23; 3 Leads; Body 3.0 x 2.5 mm, inc. leads (LxW max)"
  rect 0.85x1 smd: 1(-0.95,-1.2) 2(0.95,-1.2) 3(0,1.2)
  silkscreen extent -2.05,-1.32 1.28,1.2, body extent -1.55,-1.27 1.45,1.23, height 1.1
SOT23-5 [mil]
  rect 27x40 smd: 1(0,0) 2(37,0) 3(75,0) 4(75,102) 5(0,102)
  silkscreen extent 20,53 51,83, body extent -21,2 97,100, height 43
"SW TACT Red 6mm x 6mm" [mm] "Switch, tactile, red button, SMD 6 mm x 6 mm"
  rect 1.6x1.3 smd: 1(-4,2.25) 2(4,2.25) 3(-4,-2.25) 4(4,-2.25)
  silkscreen extent -3,-3.3 3,3.3, body extent -4.5,-3.1 4.5,3.1, height 4.3
TCRFEF [mm] "SOT95P280X110-5L0N - Small Outline Transistor (SOT23), 0.95 mm pitch; 5 pin, 2.90 mm L X 1.60 mm W X 1.10 mm H body"
  rect 0.57x1.21 smd: 1(-0.95,-1.2) 2(0,-1.2) 3(0.95,-1.2) 4(0.95,1.2) 5(-0.95,1.2)
  silkscreen extent -1.45,-2.22 1.45,0.8
TestPoint-SM [mil] "Test Point - Top Pad Only"
  oct 30x40 smd paste-40: 1(0,0)
"TestPoint-TH 35 mil" [mil] "Test Point - Thru-Hole 38 mil"
  oct 55x55 hole 35: 1(0,0)
"TestPoint-TH 42 mil" [mil] "Test Point - Thru-Hole 42 mil"
  oct 60x60 hole 42: 1(0,0)

## Part data
BAT1 BAT2 BAT3: library part JST-B3B-PH-SM4-TB, "2mm Locking Header, 3-Pin"
C1 C31 C32 C33: library part "CAP CER 1UF 16V 10% X5R 0402", "1UF 0402"
C2 C3: library part "CAP CER 12PF 50V 5% NP0 0402", "12pF 0402"
C4 C24 C29 C44 C46: library part "CAP CER 4.7UF 16V 10% X5R 0603"
C5 C12 C13 C14 C15 C17 C18 C20 C21 C23 C28 C30 C38 C40 C42 C45 C50: library part "CAP CER 0.1UF 50V 10% X7R 0402", "0.1uF 0402 50V"
C6 C7: library part "CAP CER 100PF 50V 5% NP0 0402", "100pF 0402 50V"
C8 C9: library part Capacitor, "Capacitor"
C10: library part "CAP CER 0.8pF 50V 0402", "0.8pF 0402"
C11: library part "CAP CER 1.2PF 50V NP0 0402", "1.2pF 0402"
C16 C19 C22 C34 C35 C36 C39: library part "CAP CER 100UF 16V 20% X5R 1210", "100uF 1210"
C25 C26 C27 C37: "10uF 0603"
C41: library part "CAP CER 2200PF 50V 10% X7R 0402", "2200pF 0402"
C43 C49: library part "CAP CER 0.01UF 25V 10% X5R 0402", "0.01uF 0402"
C47 C48: library part "CAP CER 2.2UF 35V 10% X5R 0402", "2.2uF 0402"
CN1: library part "Header 4", "Header, 4-Pin"
CN2: "2mm Locking Header, 7-Pin"
D1 D2 D3: "DIODE SCHOTTKY 20V 500MA SMINI2"
D4 D5: "Schottky Barrier Diode"
D6: "Schottky Barrier Rectifier 1A 30V"
E1: library part Antenna2.4GHz, "2.4GHz Trace Antenna"
GND I2C_SCL I2C_SDA RESET UART_RX UART_TX VIN: library part 0850-0-15-20-83-14-11-0
L1: library part "INDUCTOR 15nH 0402 SMD", "15nH 0402"
L2: library part "INDUCTOR 10UH 5% 0603 SMD", "10uH 0603"
L3: library part "INDUCTOR 3.9nH 0402 SMD", "3.9nH 0402"
L4: library part "INDUCTOR PWR 10UH 3A SMD", "10uH 3A 7.8x7.0mm"
L5: library part "INDUCTOR MULTILAYER 47UH 100mA 0805", "47uH 0805"
LED1 LED2 LED3: library part "LED GREEN CLEAR THIN 0603 SMD", "0603 SMD GREEN LED"
LED4 LED5 LED6 LED7 LED8 LED9: library part LTST-C19HE1WT, "LED RGB 624/525/470NM DIFF SMD"
M1 M2 M3: "2mm Locking Header, 2-Pin"
Q4 Q9 Q10 Q11: "Single P-Channel MOSFET"
Q5 Q6 Q8 Q12 Q13 Q14 Q15 Q16 Q17: "MOSFET N-CH 60V 0.36A SOT-23"
R1 R4 R8: library part "RES 6.04K OHM 1/8W 1% 0603", "6.04K 0603 RNCP0603FTD6K04"
R2 R6 R12: library part "RES 576 OHM 1% 1/10W 0402", "575 0402"
R5 R7 R36 R37 R38: library part "RES 100K OHM 5% 1/4W 0603", "100K 0603"
R9 R10 R11 R13 R14 R15: library part "RES 1M OHM 1/10W 1% 0603 SMD", "1M 0603"
R16 R21 R23: library part "RES 10K OHM 1% 1/10W 0402", "10K 0402"
R17 R18: library part "RES 100K OHM 1% 1/10W 0402"
R20: library part "RES 300K OHM 1% 1/10W 0402", "300K 0402"
R22: library part "RES 100 OHM 1% 1/10W 0402"
R24: library part "RES 510 OHM 1/10W 1% 0603 SMD", "510 0603"
R25: library part "RES 64.9K OHM 1% 1/10W 0402", "RES 64.9K OHM 1% 1/10W 0402"
R26 R27 R28: library part "RES 20K OHM 1% 1/10W 0402"
R29 R30 R31 R32: library part "RES 10K OHM 5% 1/10W 0402", "10K 0402"
R33 R34 R35: library part "RES 10K OHM 1/10W 1% 0603 SMD", "10K 0603"
R39 R40 R41 R42 R43 R44 R48 R49 R50 R51 R52 R53: library part "RES 82 OHM 1% 1/10W 0402", "82 0402"
R45 R46 R47 R54 R55 R56: library part "RES 150 OHM 1/10W 1% 0603 SMD", "150 0603"
SW1: "SWITCH TACTILE SPST-NO 0.05A 12V"
TP1 TP2 TP3 TP4 TP5 TP6 TP7 TP8: library part "TestPoint, small"
TP9 TP10: library part "TestPoint, small", "Test Point"
U1: library part nRF52832_QFAA, "Multi-protocol Bluetooth Low Energy and 2.4GHz proprietary system-on-chip"
U2 U3 U4: "2A Motor Driver"
U5 U6 U7: library part MCP73831
U8: library part TCR2EF33, "IC REG LDO 3.3V 0.2A ESV"
U9: "2A Switching Step-Up Regulator"
U10: "3D ACC/GYRO INEMO 14VFLGA"
U11: "IC MAGNETOMETER 3-AXIS 12LGA"
X1: library part "CRYSTAL 32.0000MHZ 8PF SMD", "32Mhz Parallel Load Crystal"
X2: library part "CRYSTAL 32.768KHZ 12.5PF 2-SMD", "32.768kHz 12.5PF 2-SMD"

## Via types
v1: diameter 24, hole 10, Top Layer to Bottom Layer, 168 vias
v2: diameter 34, hole 20, Top Layer to Bottom Layer, 35 vias
v3: diameter 24, hole 10, Top Layer to Bottom Layer, tented bottom, 5 vias

## Nets (pads, with @x,y where several pads share a name; then routed paths per layer and width w, separated by ;. In a path a pad name is that pad's centre, name@x,y a point inside that pad or via, vN(x,y) a via of type N, cw(c..) or ccw(c..) an arc to the next point about the centre after c; other vN are vias at no path point)
3.3V: C4.1 C12.1 C13.1 C14.1 C31.1 C48.1 CN1.3 L5.2 R29.2 R30.2 R31.1 R32.1 TP2.1 TP9.1 U1.13 U1.36 U1.48 U8.5 | length 7807.4
  Top Layer w7: -641.96,-1322.12 -641.96,-1325.37 U1.13@-630.71,-1336.61 ; U8.5@-533.46,-208.66 -529.92,-212.2 C31.1@-483.46,-212.2 ; U1.36@-422.05,-1545.28 -401.97,-1545.28 -396.46,-1539.76 v1(-396.46,-1533.07) ; U1.48@-386.61,-1336.61 -349.21,-1299.21 -348.89,-1298.7 C4.1@-338.58,-1282.28
  Top Layer w10: CN1.3@-1646.85,-1022.05 TP2.1@-1553.15,-1022.05 ; C14.1@-680.71,-1273.62 -680.71,-1283.37 -641.96,-1322.12 ; v1(998.82,714.17) 1007.48,705.51 v1(1007.48,-514.96) ; C48.1@1381.89,868.11 1389.37,860.63 L5.2@1451.57,860.63 1459.84,860.63 1539.37,781.1 1737.4,781.1 1772.21,746.29 1852.98,746.29 R32.1@1877.95,771.26
  Top Layer w12: TP2.1@-1553.15,-1022.05 -1526.15,-995.05 -1526.15,-534.02 v1(-1519.29,-527.17) ; -685.04,-1166.14 v1(-673.23,-1134.65) -673.23,-512.6 ; C12.1@-680.71,-1179.13 C12.1@-680.71,-1170.47 ; C31.1@-485.43,-214.17 C31.1@-483.46,-212.2 ; v1@-480.32,-521.65 C31.1@-480.32,-210.24 ; -348.89,-1298.7 -338.58,-1288.39 C4.1@-338.58,-1282.28 -292.13,-1235.83 -292.13,-1224.41 v1(-293.7,-1222.83)
  Top Layer w20: C14.1@-680.71,-1273.62 C13.1@-680.71,-1226.38 C12.1@-680.71,-1179.13
  Bottom Layer w7: v1(-396.46,-1533.07) -438.19,-1491.33 -438.19,-1367.32 v1(-293.7,-1222.83)
  Bottom Layer w10: v1(-481.89,-516.14) -480.71,-514.96 v1(1007.48,-514.96) ; v1(998.82,714.17) 1002.67,714.17 1074.72,786.22 1482.68,786.22 R30.2@1493.7,775.2 1500,781.5 1533.07,781.5 v1(1534.25,780.32) ; R29.2@1659.84,636.61 1662.2,638.98 R31.1@1662.2,675.59
  Bottom Layer w12: v1(-1519.29,-527.17) -1443.7,-451.57 -724.8,-451.57 -661.02,-515.35 -482.68,-515.35 v1(-481.89,-516.14) ; v1(-673.23,-1134.65) -648.82,-1144.09 -570.08,-1222.83 v1(-293.7,-1222.83)
5V: C38.1 C39.2 D6.2 Q9.2 Q10.2 Q11.2 R25.2 R33.2 R34.2 R35.2 U8.1 U8.3 | length 6831.2
  Top Layer w12: R33.2@-1556.69,-366.54 -1382.68,-192.52 Q9.2@-1382.68,-174.8 -1385.43,-172.05 v1(-1385.43,-127.17) ; v1(-671.65,-118.11) -612.2,-118.11 U8.3@-608.27,-114.17 -608.27,-138.58 -593.7,-153.15 -566.54,-153.15 ; v1(-601.97,-556.3) -601.97,-297.62 -566.54,-262.19 -566.54,-153.15 ; D6.2@-591.34,205.91 -533.46,148.03 U8.1@-533.46,-114.17 -535.83,-116.54 -535.83,-134.65 -554.33,-153.15 -566.54,-153.15 ; v1(-220.87,404.72) -73.62,551.97 v1(-73.62,1241.34) ; v1(642.91,1241.34) 642.91,1312.2 R35.2@655.51,1324.8 ; R34.2@802.36,-1425.98 805.91,-1422.44 Q10.2@805.91,-1370.47 819.29,-1357.09 819.29,-849.29 816.94,-846.95 816.94,-552.34 v1(819.29,-550)
  Top Layer w20: R25.2@-735.04,92.13 -717.72,92.13 -659.06,150.79 -659.06,167.72
  Top Layer w25: v1(-677.56,167.72) -659.06,167.72 -609.84,167.72 D6.2@-589.76,187.8 ; D6.2@-589.76,205.91 -440.94,205.91 C39.2@-415.35,231.5 -336.61,231.5 v1(-335.83,232.28) ; R35.2@655.51,1324.8 655.51,1401.18 Q11.2@659.45,1405.12
  Bottom Layer w12: v1(-1385.43,-127.17) -1376.38,-118.11 v1(-671.65,-118.11) ; v1(-601.97,-556.3) 812.99,-556.3 v1(819.29,-550) ; v1(-335.83,232.28) -335.83,289.76 v1(-220.87,404.72) ; v1(-73.62,1241.34) -72.64,1242.32 361.54,1242.32 370.66,1233.2 397.44,1233.2 406.57,1242.32 641.93,1242.32 v1(642.91,1241.34)
  Bottom Layer w25: v1(-677.56,167.72) -677.56,207.48 C38.1@-675.98,209.06
BAT_MON1: C27.1 R11.1 R15.1 U1.4 | length 3131
  Top Layer w7: R11.1@-1552.36,820.87 -1552.36,321.65 R15.1@-1420.87,190.16 -1419.29,191.73 C27.1@-1347.64,191.73 -1334.65,178.74 v1(-1334.65,-858.66) ; U1.4@-469.29,-1301.18 -466.98,-1298.87 -466.98,-913.83 -451.18,-898.03 v1(-451.18,-888.19)
  Bottom Layer w7: v1(-1334.65,-858.66) -1329.53,-863.78 -664.99,-863.78 -640.58,-888.19 v1(-451.18,-888.19)
BAT_MON2: C25.1 R9.1 R13.1 U1.5 | length 4040.4
  Top Layer w7: v1(-488.98,-839.76) -486.79,-841.95 -486.79,-1299.43 U1.5@-485.04,-1301.18 ; v1(840.94,-837.01) 840.94,789.14 1018.73,966.93 1240.75,966.93 C25.1@1244.29,970.47 R13.1@1318.6,970.47 1319,970.87 R9.1@1385.83,970.87
  Bottom Layer w7: v1(-488.98,-839.76) 838.19,-839.76 v1(840.94,-837.01)
BAT_MON3: C26.1 R10.1 R14.1 U1.37 | length 621
  Top Layer w7: U1.37@-386.61,-1509.84 -369.24,-1509.84 -365.06,-1505.66 -324.75,-1505.66 -244.97,-1585.43 v1(-202.76,-1585.43) ; v1(21.26,-1585.43) 24.02,-1588.19 R10.1@24.02,-1762.6
  Bottom Layer w7: v1(-202.76,-1585.43) v1(21.26,-1585.43)
BLUE_DRAIN: Q16.3 R39.1 R40.1 R41.1 R48.1 R49.1 R50.1 | length 10540.2
  Top Layer w7: v1(-1870.87,-672.83) -1870.87,-1000.79 R48.1@-1838.19,-1033.46 ; R39.1@-1740.94,1180.71 -1726.12,1195.54 -1687.66,1195.54 v1(-1661.81,1169.68) ; v1(-1655.91,-664.57) v1(-1655.91,747.24) ; v1(-1115.35,-664.57) -1112.2,-667.72 Q16.3@-1112.2,-698.82 -1112.2,-982.28 v1(-1105.51,-988.98) ; v1(-136.22,-1876.77) -89.76,-1876.77 -89.37,-1877.17 -89.37,-1720.47 v1(-86.61,-1717.72) ; v1(12.99,1929.53) R50.1@50,1930.32 ; v1(58.66,-1718.5) 62.6,-1714.57 v1(62.6,-1214.17) ; v1(1248.03,1110.63) R41.1@1297.24,1096.85 ; v1(1518.11,-1200.79) 1519.29,-1199.61 R40.1@1558.66,-1199.61
  Bottom Layer w7: v1(-1870.87,-672.83) -1862.6,-664.57 v1(-1655.91,-664.57) v1(-1115.35,-664.57) ; v1(-1655.91,747.24) -1655.91,1163.78 v1(-1661.81,1169.68) 9.06,1931.1 v1(12.99,1929.53) 265.35,1830.32 v1(1248.03,1110.63) ; v1(-1105.51,-988.98) -1069.69,-988.98 -872.5,-1186.16 -872.5,-1186.56 -184.25,-1874.8 -138.19,-1874.8 v1(-136.22,-1876.77) ; v1(-86.61,-1717.72) -87.01,-1717.72 v1@-87.8,-1718.5 ; v1(58.66,-1718.5) v1@-87.8,-1718.5 ; v1(62.6,-1214.17) 65.75,-1217.32 1408.94,-1217.32 1425.47,-1200.79 v1(1518.11,-1200.79) ; v1@-87.8,-1718.5 -92.91,-1723.62 -98.03,-1718.5 v1@-87.8,-1718.5
CS_LIS: R32.2 U1.21 U11.10 | length 5218.5
  Top Layer w7: v1(-860.24,-892.91) -870.87,-903.54 -870.87,-1053.9 -809.95,-1114.82 -809.95,-1322.99 -672.65,-1460.29 -633.02,-1460.29 U1.21@-630.71,-1462.6 ; R32.2@1917.32,771.26 1917.32,736.22 v1(1918.9,734.65) 1918.9,207.53 1934.7,191.73 1934.7,-199.66 1932.28,-202.07 v1(1928.35,-888.19)
  Bottom Layer w7: v1(-860.24,-892.91) -853.7,-886.37 -660.78,-886.37 -633.53,-913.63 584.41,-913.63 610.08,-887.95 1928.11,-887.95 v1(1928.35,-888.19) ; U11.10@1916.54,769.68 1918.9,772.05 v1(1918.9,734.65)
CS_LSM: R30.1 U1.12 U10.12 | length 4209.7
  Top Layer w7: U1.12@-595.28,-1301.18 -622.78,-1273.68 -622.78,-645.22 -559.45,-581.89 v1(-510.24,-581.89) ; v1(764.17,-581.5) 768.11,-577.56 v1(768.11,707.87)
  Bottom Layer w7: v1(-510.24,-581.89) 763.78,-581.89 v1(764.17,-581.5) ; v1(768.11,707.87) 785.2,690.79 1009.69,690.79 1090.63,771.72 1456.23,771.72 1514.57,713.39 U10.12@1514.57,688.19 U10.12@1512.99,688.19
GND: BAT1.0 BAT1.1 BAT2.0 BAT2.1 BAT3.0 BAT3.1 C1.2 C2.2 C3.2 C4.2 C5.2 C6.2 C7.2 C8.1 C9.1 C10.2 C11.2 C12.2 C13.2 C14.2 C15.1 C16.2 C18.1 C19.2 C21.1 C22.2 C24.2 C25.2 C26.2 C27.2 C30.2 C31.2 C33.2 C34.2 C35.2 C36.2 C37.2 C38.2 C39.1 C40.2 C41.2 C42.2 C43.2 C44.2 C45.2 C46.2 C47.2 C48.2 C49.2 C50.2 CN1.1 CN2.0 CN2.7 GND.1 M1.0 M2.0 M3.0 Q5.2 Q6.2 Q8.2 Q12.2 Q13.2 Q14.2 Q15.2 Q16.2 Q17.2 R1.1 R4.1 R5.1 R7.1 R8.1 R13.2 R14.2 R15.2 R21.1 R23.1 R27.1 R28.2 R36.1 R37.1 R38.1 SW1.1 SW1.2 TP4.1 TP10.1 U1.31 U1.45 U1.49 U2.1 U2.4 U2.9 U3.1 U3.4 U3.9 U4.1 U4.4 U4.9 U5.2 U6.2 U7.2 U8.2 U9.4 U10.6 U10.7 U11.2 U11.3 U11.12 X1.2 X1.4 | length 558.4
  Top Layer w7: v3(-508.66,-1423.23) -469.29,-1383.86 U1.45@-386.61,-1383.86 -344.49,-1383.86 v1(-338.19,-1377.56) ; U1.31@-500.79,-1545.28 -500.79,-1578.14 -483.86,-1595.07 C10.2@-483.86,-1616.93 -483.86,-1668.71 C11.2@-483.27,-1669.3 -447.26,-1669.3 C7.2@-444.09,-1666.14 -404.72,-1666.14 C6.2@-403.94,-1666.93 ; v1(-343.31,-1540.16) -342.91,-1540.16 -350,-1547.24 C2.2@-350,-1566.54 -350,-1606.3 X1.4@-351.57,-1607.87 -333.52,-1625.93 -324.36,-1625.93 -324.36,-1635.09 -308.27,-1651.18 X1.2@-296.46,-1651.18
  Bottom Layer w7: v1@-342.91,-1382.28 v1(-338.19,-1377.56)
  other v3: -465.35,-1466.54 -535.83,-1450.39 -551.97,-1379.92 -465.35,-1379.92
GREEN_DRAIN: Q15.3 R42.1 R43.1 R44.1 R51.1 R52.1 R53.1 | length 10239.2
  Top Layer w7: R42.1@-1740.95,576.77 -1731.09,566.91 -1731.09,484.12 -1716.64,469.67 -1716.64,-716.83 -1681.89,-751.57 R51.1@-1681.89,-839.37 ; Q15.3@-1255.12,-702.76 -1254.33,-703.54 v1(-1254.33,-747.64) -1245.67,-756.3 v1(-1245.67,-961.02) ; v1(224.02,-1681.1) 259.45,-1681.1 R52.1@266.93,-1688.58 269.68,-1685.83 v1(269.68,-985.04) ; v1(247.24,1768.11) R53.1@271.26,1994.88 ; v1(1064.96,1122.44) R44.1@1294.88,1140.16 ; v1(1637.8,-985.04) 1642.52,-980.31 R43.1@1674.8,-980.31
  Bottom Layer w7: v1(-1726.77,438.98) -1723.93,438.98 -1621.41,541.5 -1621.41,794.17 -1621.77,794.53 -1621.77,1080.59 -1618.9,1083.46 v1(247.24,1768.11) v1(1064.96,1122.44) ; v1(-1681.1,-751.57) -1677.17,-747.64 v1(-1254.33,-747.64) ; v1(-1245.67,-961.02) -1077.84,-961.02 -357.76,-1681.1 v1(224.02,-1681.1) ; v1(269.68,-985.04) 273.07,-988.43 1634.41,-988.43 v1(1637.8,-985.04)
I2C_CLK: CN2.5 I2C_SCL.1 U1.22 | length 5509.7
  Top Layer w7: v1(-888.98,-830.71) -888.98,-1054.18 -822.95,-1120.21 -822.95,-1328.38 -675.29,-1476.04 -633.02,-1476.04 U1.22@-630.71,-1478.35 ; CN2.5@-743.7,1449.61 -672.44,1378.35 v1(-672.44,1368.9) ; v1(384.65,1351.97) 404.48,1332.14 404.48,1280.71 409.18,1276.01 409.18,1248.47 404.48,1243.77 404.48,1218.7 418.31,1204.87 I2C_SCL.1@418.31,-112.09 416.54,-113.87 v1(416.54,-864.57)
  Bottom Layer w7: v1(-888.98,-830.71) -556.62,-830.71 -526.07,-861.26 -466.87,-861.26 -465.2,-859.6 411.57,-859.6 v1(416.54,-864.57) ; v1(-672.44,1368.9) 367.72,1368.9 v1(384.65,1351.97)
I2C_DAT: CN2.4 I2C_SDA.1 U1.39 | length 4063.4
  Top Layer w7: CN2.4@-811.89,1410.24 -769.87,1410.24 -730.23,1370.6 -711.62,1370.6 -683.42,1342.4 -661.46,1342.4 -645.94,1357.92 -629.18,1357.92 -476.77,1205.51 -476.77,830.31 -447.62,801.17 -447.62,465.34 v1(-383.86,401.57) ; U1.39@-386.61,-1478.35 -384.3,-1476.04 -311.06,-1476.04 -256,-1531.1 v1(-207.48,-1531.1) ; v1(98.43,-1529.13) 95.35,-1526.05 95.35,-1140.87 93.54,-1139.05 93.54,-507.4 112.09,-488.85 I2C_SDA.1@112.09,-418.31
  Bottom Layer w7: v1(-383.86,401.57) -358.33,401.57 -352.59,395.83 -352.59,247.34 -358.33,241.6 -358.33,222.96 -352.59,217.23 -352.59,-112.34 -327.7,-137.24 -327.7,-171.4 -146.58,-352.52 46.29,-352.52 I2C_SDA.1@112.09,-418.31 ; v1(-207.48,-1531.1) -205.51,-1529.13 v1(98.43,-1529.13)
I2C_SCK: R29.1 U10.3 | length 45.8
  Bottom Layer w7: U10.3@1580.32,642.13 1605.51,642.13 1605.91,642.52 R29.1@1625.98,642.52
I2C_SDA: R31.2 U10.2 | length 53.3
  Bottom Layer w7: U10.2@1580.32,661.81 1602.76,661.81 1614.57,673.62 R31.2@1628.74,673.62
IMU_INT1: TP5.1 U1.7 U10.4 | length 4009.4
  Top Layer w7: v1(-521.26,-711.81) -521.26,-770.94 -548.82,-798.49 -548.82,-1234.62 -516.54,-1266.9 U1.7@-516.54,-1301.18 ; TP5.1@1107.09,-719.29 1107.09,-705.51 1104.94,-703.37 1104.94,360.06 v1(1107.09,362.2)
  Bottom Layer w7: v1(-521.26,-711.81) 1114.57,-711.81 TP5.1@1107.09,-719.29 ; v1(1107.09,362.2) 1333.46,362.2 1479.87,508.61 1577.9,508.61 1602.42,533.13 1602.42,601.91 1581.89,622.44 U10.4@1580.32,622.44
IMU_INT2: TP8.1 U1.8 U10.9 | length 4171.7
  Top Layer w7: v1(-558.27,-768.9) -570.16,-780.79 -570.16,-1233.07 -532.28,-1270.95 U1.8@-532.28,-1301.18 ; v1(1038.19,670.87) 1030.71,663.39 1030.71,-751.57 TP8.1@1039.76,-760.63
  Bottom Layer w7: v1(-558.27,-768.9) -550,-760.63 TP8.1@1039.76,-760.63 ; v1(1038.19,670.87) 1038.19,696.85 1100.06,758.72 1398.37,758.72 1442.91,714.17 v1(1442.91,664.57) 1465.35,642.13 U10.9@1488.19,642.13
LED_BANK_A: Q14.1 R38.2 U1.23 | length 1673.3
  Top Layer w7: Q14.1@-1290.94,-371.65 -1280.32,-361.02 R38.2@-1212.2,-361.02 -1211.02,-359.84 v1(-1160.63,-359.84) ; v1(-907.09,-355.12) -910.48,-358.51 -910.48,-1051.06 -835.95,-1125.59 -835.95,-1333.76 -675.61,-1494.09 U1.23@-630.71,-1494.09
  Bottom Layer w7: v1(-1160.63,-359.84) -911.81,-359.84 v1(-907.09,-355.12)
LED_BANK_B: Q13.1 R37.2 U1.40 | length 1053.7
  Top Layer w7: U1.40@-386.61,-1462.6 -369.24,-1462.6 -364.18,-1457.54 -299.15,-1457.54 v1(-259.45,-1497.24) ; v1(532.28,-1522.44) 537.8,-1527.95 R37.2@581.5,-1527.95 574.8,-1521.26 Q13.1@574.8,-1476.38
  Bottom Layer w7: v1(-259.45,-1497.24) 507.09,-1497.24 v1(532.28,-1522.44)
LED_BANK_C: Q12.1 R36.2 U1.27 | length 4626.4
  Top Layer w7: v1(-887.01,1251.97) -899.07,1239.91 -899.07,1087.54 -959.45,1027.17 -959.45,-1041.03 -861.95,-1138.53 -861.95,-1346.32 -861.95,-1363.62 -839.74,-1385.83 -816.93,-1444.88 -783.46,-1514.96 -658.27,-1587.01 -582.02,-1583.52 -563.78,-1565.28 U1.27@-563.78,-1545.28 ; R36.2@436.61,1237.4 430.71,1243.31 Q12.1@430.71,1304.33 443.7,1304.33 v1(465.75,1282.28)
  Bottom Layer w7: v1(-887.01,1251.97) -94.81,1251.97 -82.94,1263.84 -64.3,1263.84 -58.29,1257.82 468.11,1257.82 468.11,1279.92 v1(465.75,1282.28)